# Altium PCB Boost.PcbDoc
Units mil, origin at the board's own origin, x right, y up, seen from the top; angles counter-clockwise.
Board outline 1968.5 x 1968.5 mil, 2 copper layers (Top Layer, Bottom Layer); 16 components, 10 nets, 36 pads, 0 vias.
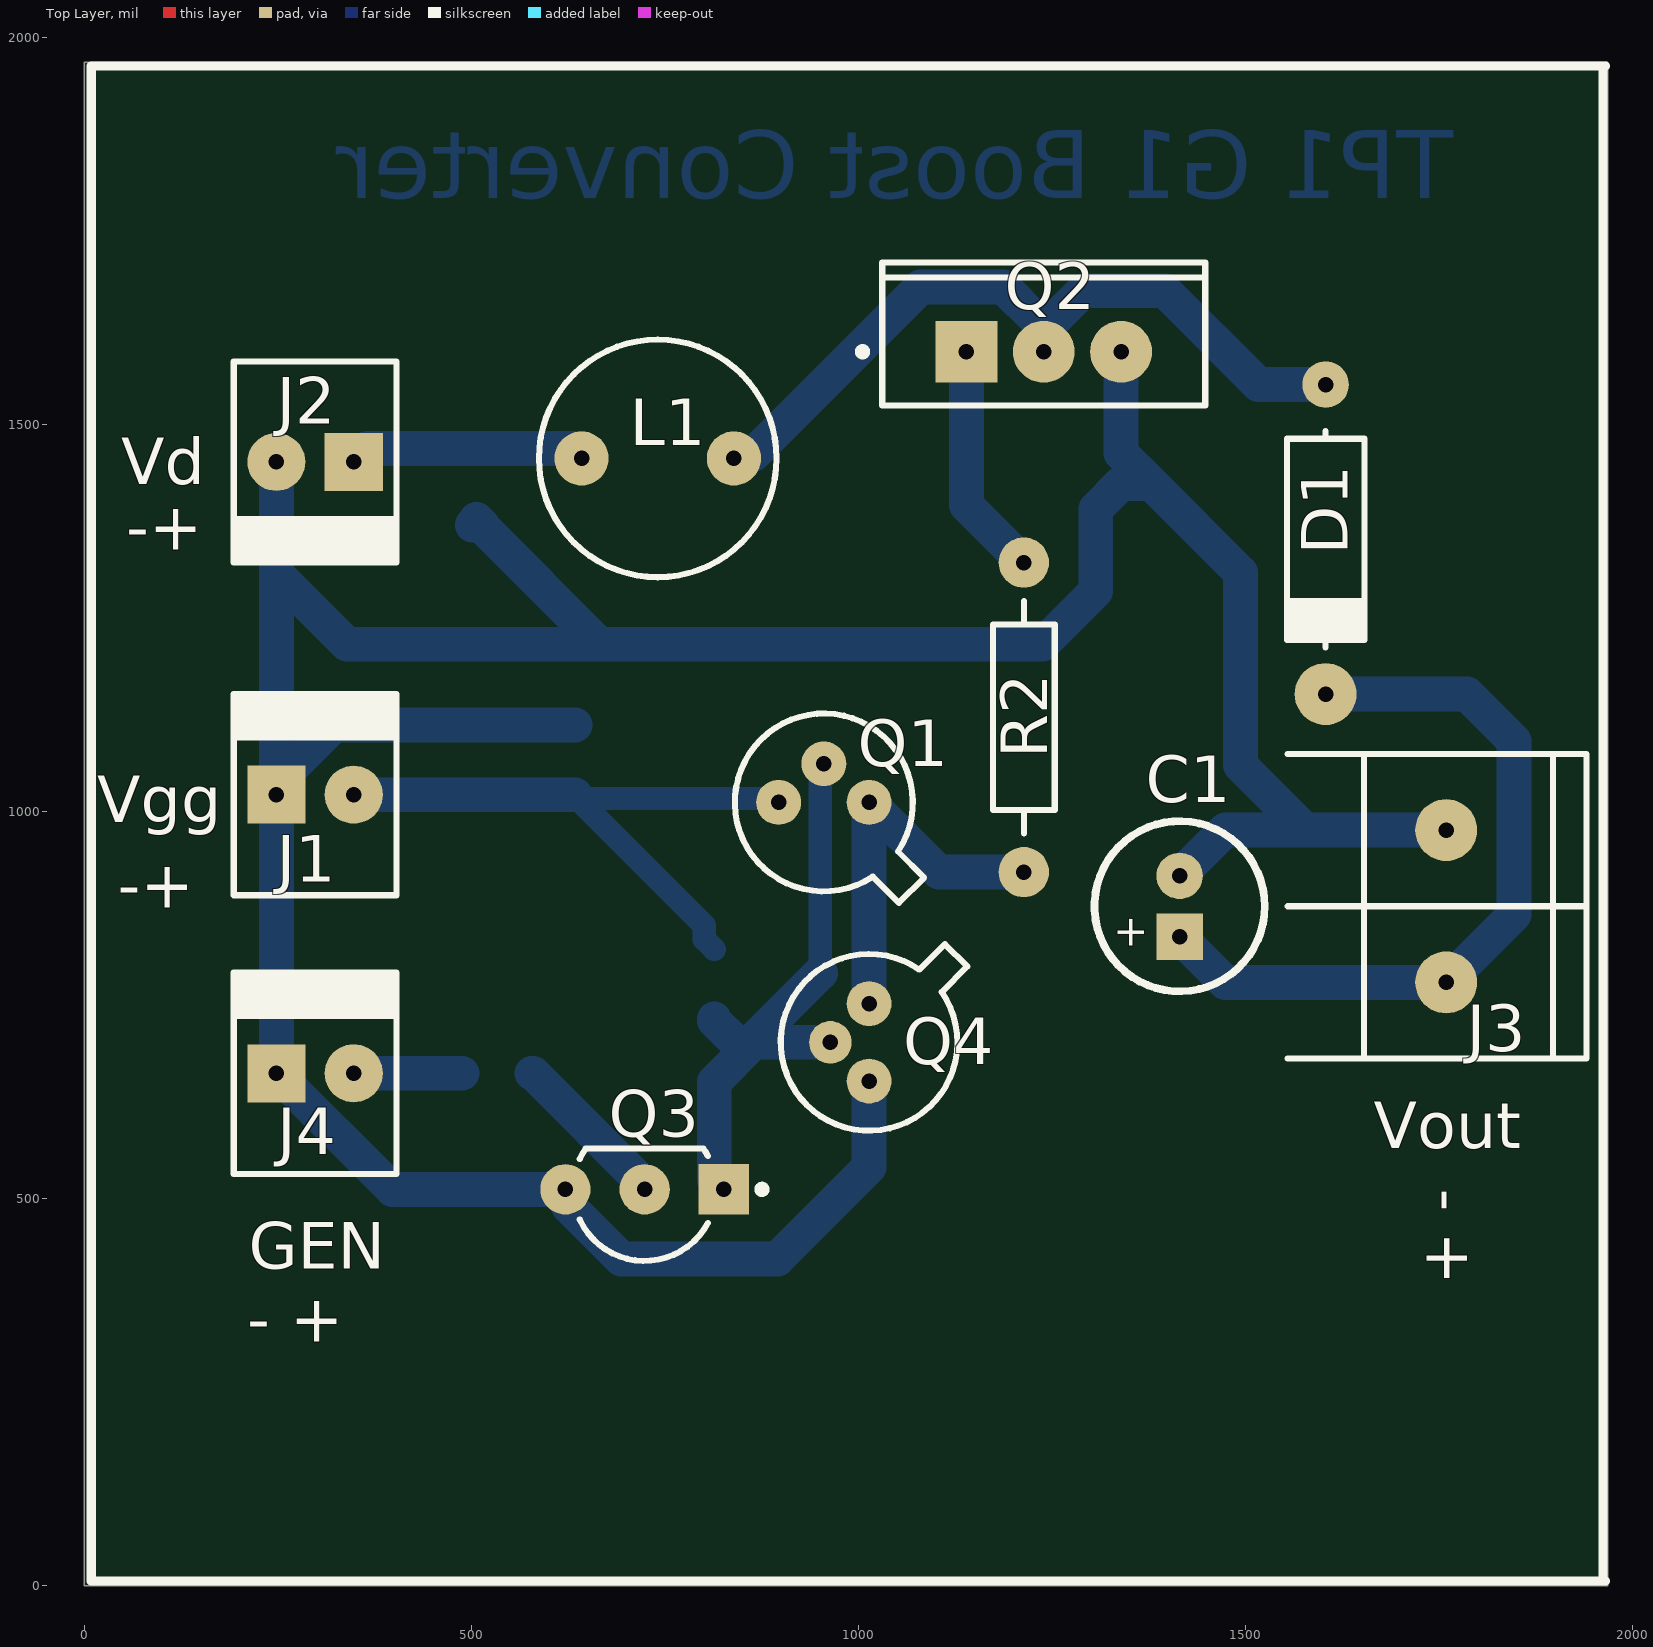
[diagram p0: Top Layer view]
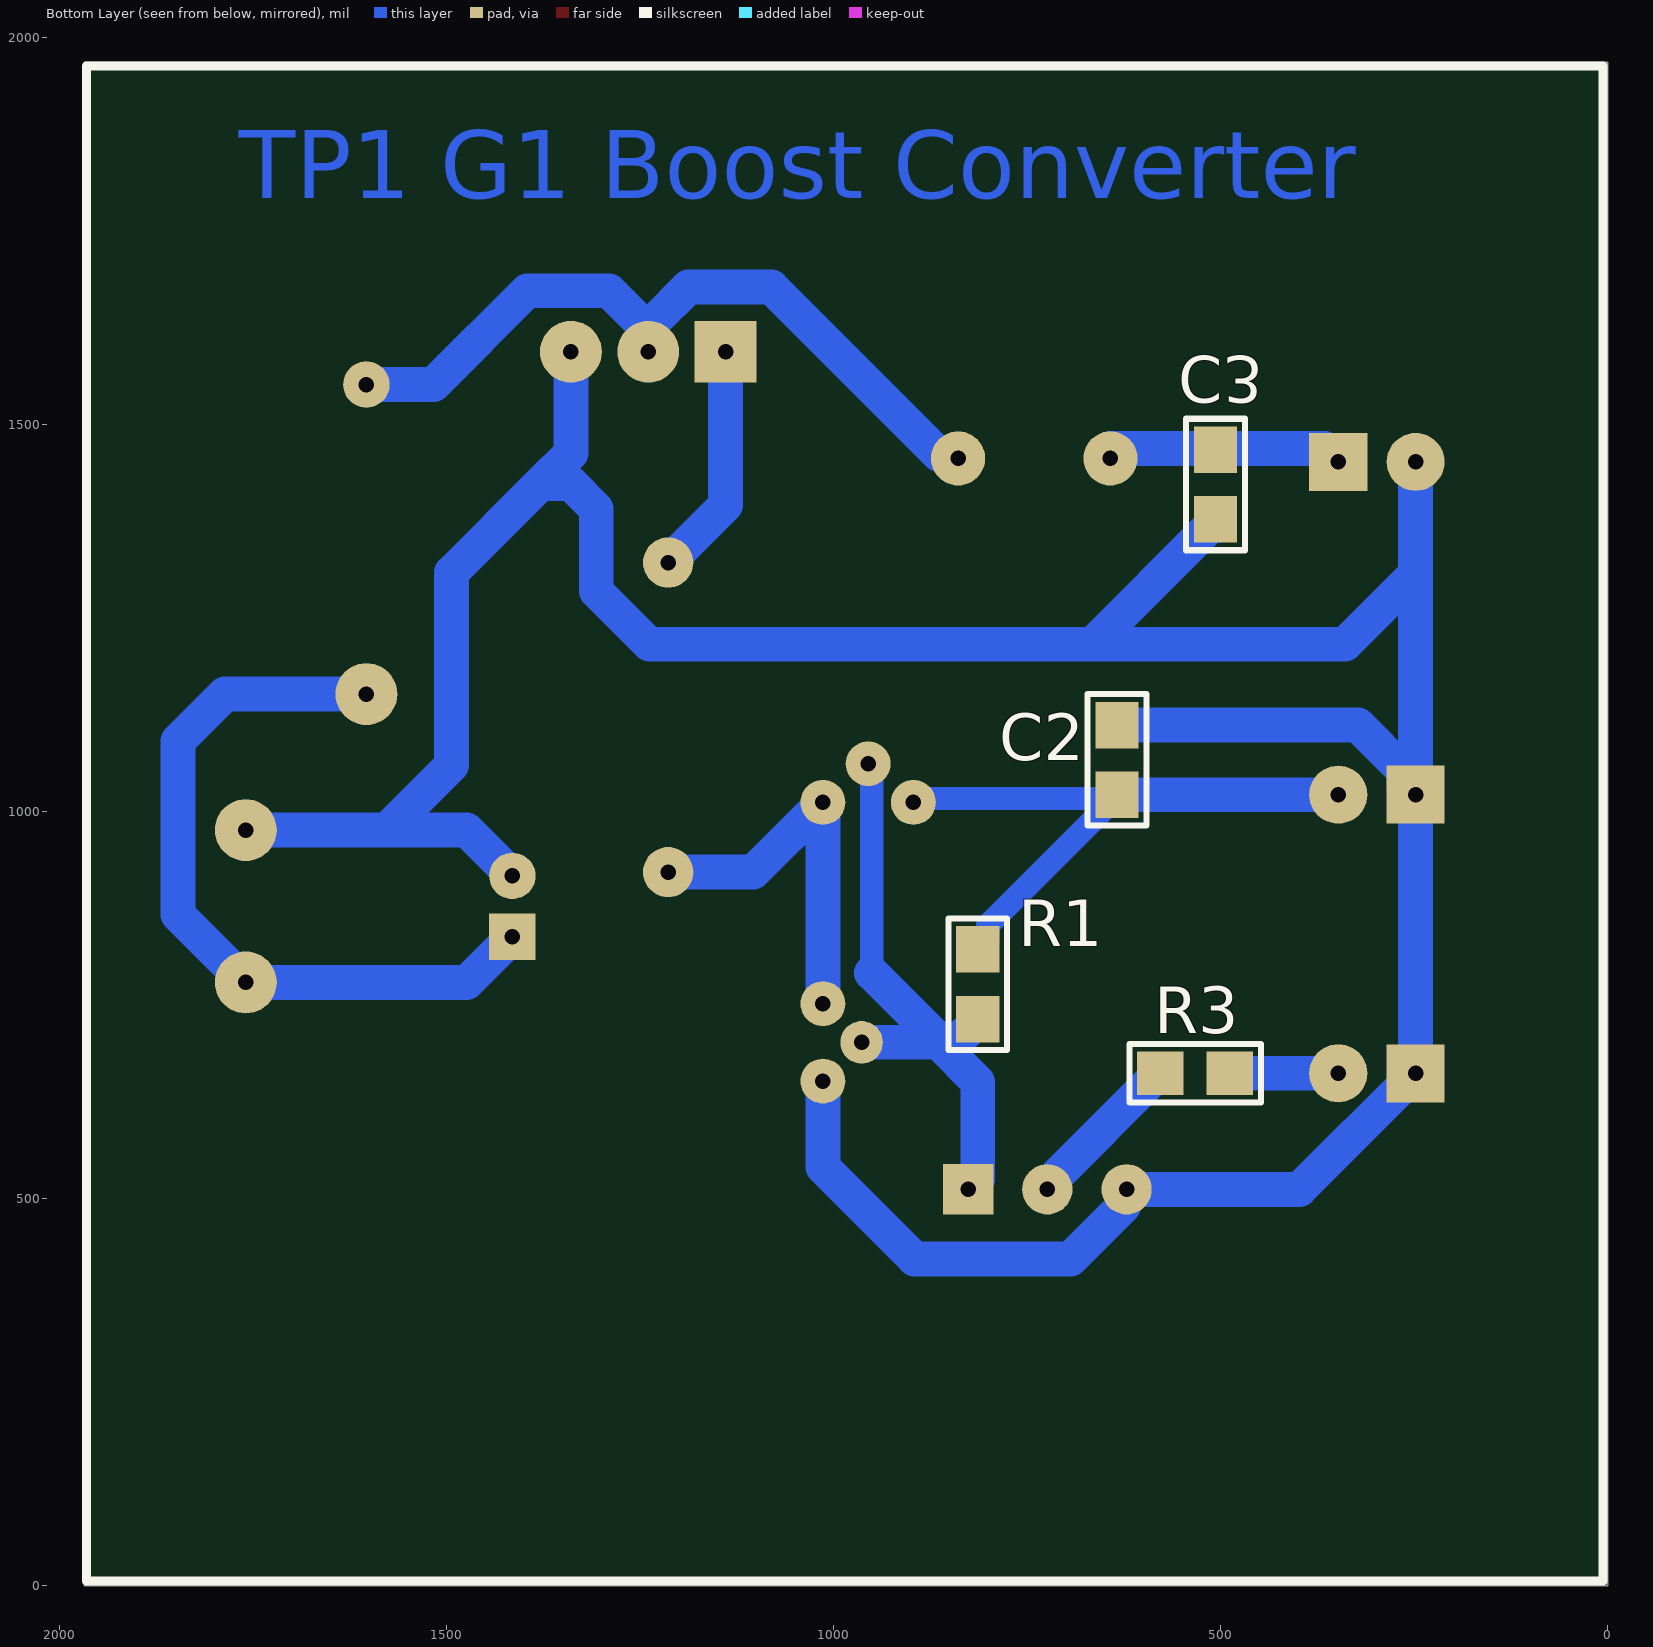
[diagram p1: Bottom Layer view, seen from below]
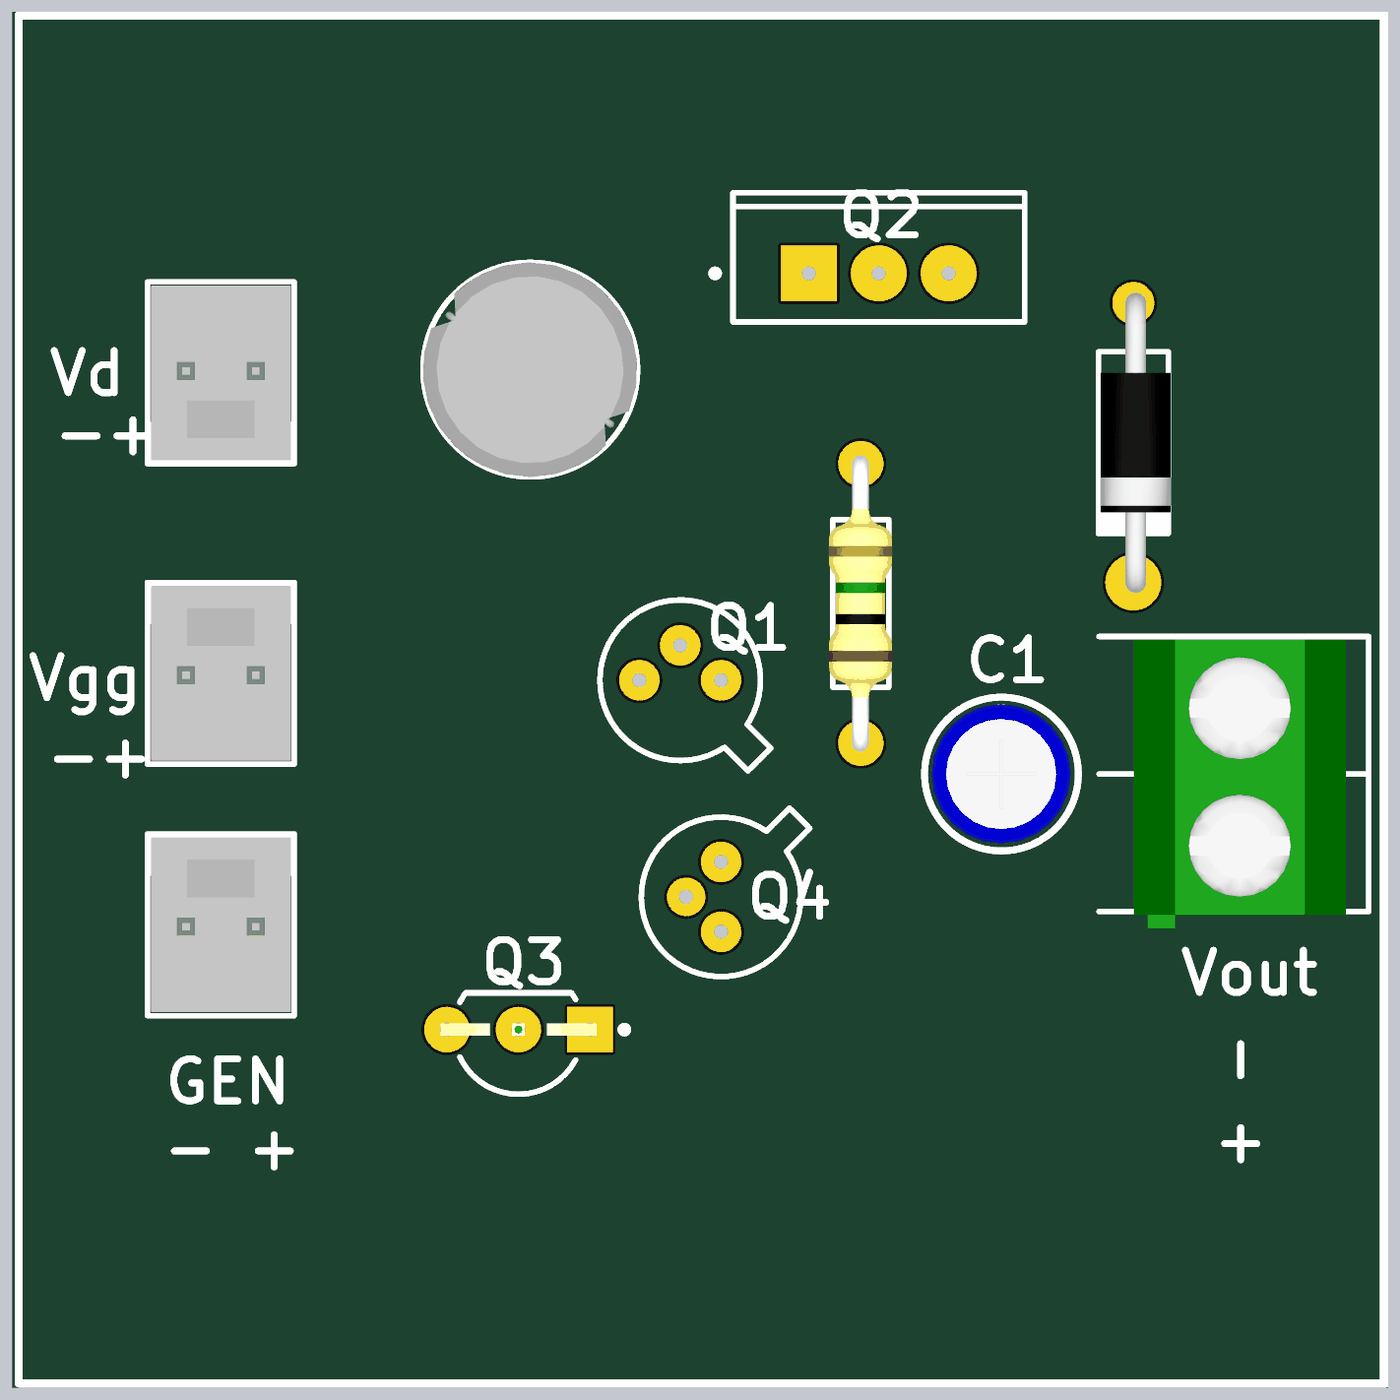
[diagram p2: 3D render of the assembled board from above, using the file's embedded part models]
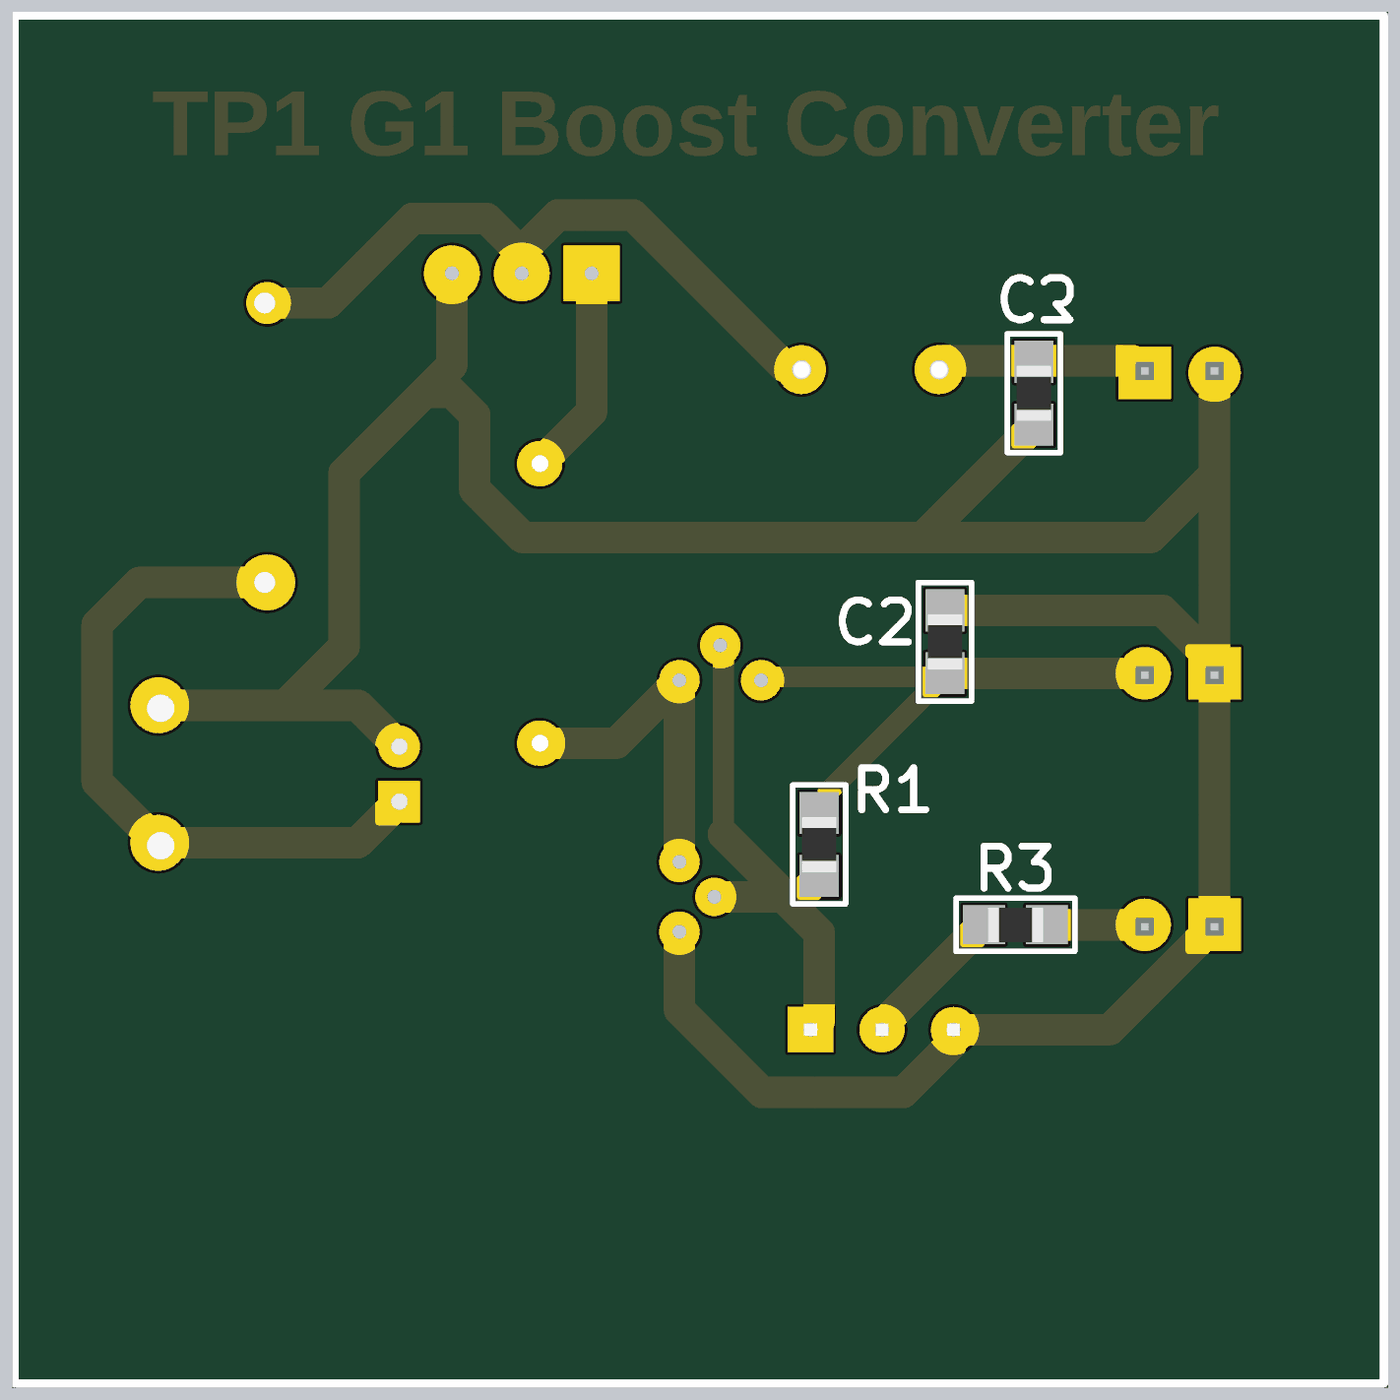
[diagram p3: 3D render of the assembled board from below, using the file's embedded part models]

## Layer stack, top to bottom
Top Solder: solder mask 0.4, Solder Resist, Dk 3.5
Top Layer: signal copper 1.4
Dielectric 1: dielectric 12.6, FR-4, Dk 4.8
Bottom Layer: signal copper 1.4
Bottom Solder: solder mask 0.4, Solder Resist, Dk 3.5

## Board outline
0,0 1968.5,0 1968.5,1968.5 0,1968.5

## Design rules (kind name [scope] priority, off if disabled: settings)
Clearance [All] p1: gap=10 ignorepadtopadclearanceinfootprint=FALSE except(0: Arc-Hole Track-Hole SMDPad-Hole THPad-Hole Via-Hole Fill-Hole Poly-Hole Region-Hole Text-Hole; 15: Arc-Fill Arc-Poly Arc-Region Track-Fill Track-Poly Track-Region SMDPad-Fill SMDPad-Poly SMDPad-Region THPad-Fill THPad-Poly THPad-Region Via-Fill Via-Poly Via-Region)
HoleToHoleClearance [All] p1: gap=5 allowstackedmicrovias=TRUE
MinimumSolderMaskSliver [All] p1: minsoldermaskwidth=5
PlaneClearance [All] p1: clearance=40
PolygonConnect [All] p1: connectstyle=Relief reliefconductorwidth=20 reliefentries=4 polygonreliefangle="90 Angle" airgapwidth=10
RoutingVias [All] p1: holewidth=28 width=50 viastyle="Through Hole" minholewidth=28 minwidth=50 maxholewidth=28 maxwidth=50
SilkToSilkClearance [All] p1: silktosilkclearance=0
SilkToSolderMaskClearance [IsPad] p1: minsilkscreentomaskgap=0 clearancetoexposedcopper=TRUE
SolderMaskExpansion [All] p1: expansion=4 istentingtop=FALSE
Width [All] p1: maxlimit=60 minlimit=10 preferedwidth=20
25 further rules are at their usual default settings.

## Components (designator, comment, footprint, x,y, rotation, side; value= is the part's Value field where it differs from the comment)
C1 "4.7u" CAP100RP 1415.35,877.95 r90 top
C2 "1u" 0805 634.04,1067.13 r270 bottom
C3 "1u" 0805 506.72,1422.95 r90 bottom
D1 "MUR160" DO41 1604.04,1352.13 r270 top
J1 "Vgg" MOLEX2 248.14,1022.13 r0 top
J2 "Vd" MOLEX2 348.14,1452.13 r180 top
J3 "LOAD" BORNERA2 1759.84,877.95 r180 top
J4 "Generador" MOLEX2 248.14,662.13 r0 top
L1 "221KL" WE-TI-L 740.97,1456.69 r0 top
Q1 "2N2222" MLTC-TO-18-3 955.58,1012.13 r180 top
Q2 "IRF540" VISH-TO-220AB-3_A 1239.76,1594.49 r90 top
Q3 "BC547BRL1G" ONSC-TO-92-3-29-11_AM_BL 724.04,512.13 r180 top
Q4 "2N2907A" STM-TO-18-3 1014.04,702.13 r270 top
R1 "1K" 0805 814.04,777.13 r90 bottom
R2 "22" RES400 1214.04,922.13 r90 top
R3 "330" 0805 533.14,662.13 r0 bottom

## Footprints (in the part's own frame and the unit in brackets; to place one, negate y for a bottom-side part, rotate by r counter-clockwise, add the part's x,y. Pads: shape width x height; smd on the part's side, far side on the other; paste and mask are expansions set on the pad)
0805 [mil] "Pasivo 0805"
  rect 60x56 smd: 1(-45,0) 2(45,0)
  silkscreen extent -85,-38 85,38, body extent -40,-25 39,25, height 15
BORNERA2 [mil] "Bornera con Tornillos 5mm separación"
  round 80 hole 20: 1(0,98.43) 2(0,-98.43)
  silkscreen extent -181,-197 205,197, body extent -148,-193 155,221, height 394
CAP100RP [mil] "Body diameter 5mm"
  rect 60x60 hole 20: 1(-39.37,0)
  round 60 hole 20: 2(39.37,0)
  silkscreen extent -110,-110 110,110, body extent -99,-99 99,100, height 454
DO41 [mil]
  round 60 hole 20: 1(-200,0)
  round 80 hole 20: 2(200,0)
  silkscreen extent -140,-50 140,50, body extent -215,-47 215,54, height 80
MLTC-TO-18-3 [mil] "TO-18, 3-Leads"
  round 58 hole 20: 1(-58.46,0) 2(0,-50) 3(58.46,0)
  silkscreen extent -130,-115 115,130, body extent -129,-115 115,130, height 210
MOLEX2 [mil]
  rect 75x75 hole 20: 1(0,0)
  round 75 hole 20: 2(100,0)
  silkscreen extent -55,-130 155,130, body extent -50,-125 150,125, height 423
ONSC-TO-92-3-29-11_AM_BL [mil] "TO, 3-Leads, Body Dia 4.7mm, Pitch 2.6mm"
  rect 65x65 hole 20: 1(-102.36,0)
  round 65 hole 20: 2(0,0) 3(102.36,0)
  silkscreen extent -156,-53 84,92, body extent -112,-53 112,93, height 210
RES400 [mil]
  round 65 hole 20: 1(0,0) 2(400,0)
  silkscreen extent 50,-40 350,40, body extent -12,-45 412,46, height 95
STM-TO-18-3 [mil] "TO, 3-Leads, Diameter 5.8mm"
  round 55 hole 20: 1(0,-50)
  round 58 hole 20: 2(50,0) 3(-50,0)
  silkscreen extent -127,-114 114,127, body extent -127,-114 114,127, height 209
VISH-TO-220AB-3_A [mil] "FM, 3-Leads, Body 10.55x4.65mm, Pitch 2.54mm"
  rect 80x80 hole 20: 1(0,100)
  round 80 hole 20: 2(0,0) 3(0,-100)
  silkscreen extent -69,-209 116,239, body extent -69,-208 115,208, height 760
WE-TI-L [mil] "THT Inductor, 2-Leads, Body 7.8 x 7.8 mm"
  round 70 hole 20: 1(-98.43,0) 2(98.43,0)
  silkscreen extent -154,-154 154,154, body extent -154,-154 153,153, height 374

## Part data
C1: library part CAPPOL
C2 C3: library part CAP
D1: library part DIODO
J1 J2 J4: library part MOLEX2
J3: library part "BORNERA 2"
L1: library part CMP-0225-00044-1, "Radial Leaded Wire Wound Inductor WE-TI, L = 22.0 µH", Inductance="22.0 ÂµH", ComponentLink1Description="Manufacturer Link", ComponentLink1URL=http://www.we-online.com, ComponentLink2Description=Datasheet, ComponentLink2URL=http://www.we-online.de/katalog/media/pdf/744772220.pdf, DatasheetVersion="ver 2, Dec-2004", PackageDescription="THT Inductor, 2-Leads, Body 7.8 x 7.8 mm", PackageReference=WE-TI-L, PackageVersion=2006
Q1: library part CMP-2000-05237-1, "Low Power Bipolar NPN Transistor, 30 V, -65 to 200 degC, 3-Pin TO-18, RoHS, Bulk", Collector Emitter Voltage V(br)ceo=30V, Collector Emitter Voltage Vces=400mV, Continuous Collector Current Ic Max=800mA, Current Ic @ Vce Sat=150mA, DC Current Gain hFE=100, Full Power Rating Temperature=25degC, Manufacturer=Multicomp, Package / Case=TO-18, Package Description="3-Pin Transistor Outline Package (TO-18), Dia 5.54 mm, Pitch Pitch 1.485mm", Package Reference=TO-18-3, Power Dissipation Pd=500mW, Voltage Vcbo=60V, Current Ic Continuous a Max=800mA, Current Ic hFE=150mA, Datasheet URL=http://www.farnell.com/datasheets/1662272.pdf, Datasheet Version="Rev. 1.1, 05/2012", DC Collector Current=800mA, Gain Bandwidth ft Min=250MHz, Gain Bandwidth ft Typ=250MHz, hFE Min=100, Manufacturer URL=http://uk.farnell.com/b/multicomp, No. of Pins=3, No. of Transistors=1, Pin Configuration=a, Power Dissipation Ptot Max=500mW, SVHC=NoSVHC(19-Dec-2012), Transistor Case Style=TO-18, Transistor Polarity=NPN
Q2: library part CMP-2000-06461-1, "Power MOSFET, 100 VDS, -55 to 175 degC, 3-Pin TO-220AB, RoHS, Tube", Id - Continuous Drain Current=28A, Manufacturer=Vishay, Maximum Operating Temperature=+175C, Minimum Operating Temperature=-55C, Package / Case=TO-220-3, Package Description="3-Pin Flange Mount, Body 10.275 x 4.45 mm, Pitch 2.54 mm", Package Reference=TO-220AB-3, Pd - Power Dissipation=150W, Rds On - Drain-Source Resistance=77mOhms, Vds - Drain-Source Breakdown Voltage=100V, Vgs - Gate-Source Voltage=20V, &lt;PCN&gt;=http://www.mouser.com/PCN/Vishay_SIL_0182015.pdf, Brand=VishaySemiconductors, Channel Mode=Enhancement, Configuration=Single, Datasheet URL=http://www.vishay.com/docs/91021/91021.pdf, Datasheet Version="Rev. B, 03/2011", Factory Pack Quantity=50, Fall Time=43ns, Height=9.01mm, Length=10.51mm, Manufacturer URL=http://www.vishay.com/, Mounting Style=ThroughHole, Mounting Technology=ThroughHole, Number of Channels=1Channel, Package URL=http://www.vishay.com/docs/71195/to220ab.pdf, Packaging=Tube, Product Category=MOSFET, Rise Time=44ns, RoHS=NoRoHSVersionAvailable, Technology=Si, Transistor Polarity=N-Channel, Transistor Type=1N-Channel, Typical Turn-Off Delay Time=53ns, Typical Turn-On Delay Time=11ns, Unit Weight=0.211644oz, Width=4.7mm
Q3: library part CMP-1048-01605-1, "Amplifier Transistor, NPN Silicon, 3-Pin TO-92, Pb-Free, Tape and Reel", Manufacturer="On Semiconductor", ComponentLink1Description="Manufacturer URL", ComponentLink1URL=http://www.onsemi.com/, ComponentLink2Description=Datasheet, ComponentLink2URL=http://www.onsemi.com/pub_link/Collateral/BC546-D.PDF, ComponentLink3Description="Package Specification", ComponentLink3URL=http://www.onsemi.com/pub_link/Collateral/MAC97-D.PDF, DatasheetVersion="Rev. 7", fT Min (MHz)=150, IC Continuous (A)=0.1, Mounting Technology="Through Hole", PackageDescription="3-Pin Transistor Outline, Body 4.825 x 3.685 mm, Pitch 1.27 mm", PackageReference=TO-92-3-29-11_AM_BL, PackageVersion="Rev. AM", Packing="Tape and Reel", PartNumber=BC547BRL1G, Polarity=NPN, RoHS=TRUE
Q4: library part CMP-2000-05561-1, "Small Signal PNP Transistor, 0.4 W, 60 V, 600 mA, 3-Pin TO-18, RoHS, Bulk", Collector Emitter Voltage V(br)ceo=-60V, DC Collector Current=-600mA, DC Current Gain hFE=300hFE, Manufacturer=STMicroelectronics, Operating Temperature Max=175°C, Package Description="3-Pin Through Hole Device, Dia 5.8 mm, Pitch 1.27 mm", Package Reference=TO-18-3, Power Dissipation Pd=400mW, Transistor Case Style=TO-18, Transition Frequency ft=200MHz, Automotive Qualification Standard=-, Datasheet URL=https://datasheet.ciiva.com/16614/cd00003088-16614659.pdf, Datasheet Version=02/2003, Manufacturer URL=http://www.st.com/, Mounting Technology=ThroughHole, MSL=-, No. of Pins=3Pins, Product Range=-, SVHC=NoSVHC(17-Dec-2015), Transistor Polarity=PNP
R1 R2 R3: library part RES

## Nets (pads, with @x,y where several pads share a name; then routed paths per layer and width w, separated by ;. In a path a pad name is that pad's centre, name@x,y a point inside that pad or via, vN(x,y) a via of type N, cw(c..) or ccw(c..) an arc to the next point about the centre after c; other vN are vias at no path point)
GND: C1.2 C2.1 C3.1 J1.1 J2.2 J3.2 J4.1 Q2.3 Q3.3 Q4.2 | length 4898.3
  Bottom Layer w45: J2.2 248.14,1307.96 ; C3.1@501.22,1370.45 506.72,1375.95 C3.1 514.72,1369.95 514.72,1367.95 666.14,1216.54 ; C2.1 322.76,1112.13 263.14,1052.51 263.14,1037.13 J1.1 ; Q4.2 1014.04,540.62 895.55,422.13 694.02,422.13 625.51,490.63 625.51,508.3 Q3.3 398.14,512.13 J4.1 J1.1 ; Q2.3 1339.76,1463.33 1378.89,1424.21 ; C1.2 1474.41,976.38 1577.76,976.38 ; J3.2 1577.76,976.38 ; J1.1 248.14,1307.96 ; 248.14,1307.96 339.57,1216.54 666.14,1216.54 ; 666.14,1216.54 1238.45,1216.54 1307,1285.08 1307,1391.43 1339.78,1424.21 1378.89,1424.21 ; 1378.89,1424.21 1494.04,1309.06 1494.04,1060.09 1577.76,976.38
NetC1_1: C1.1 D1.2 J3.1 | length 985.7
  Bottom Layer w45: C1.1 1474.41,779.53 J3.1 1847.44,867.13 1847.44,1091.54 1786.85,1152.13 D1.2
NetC2_2: C2.2 J1.2 Q1.3 R1.2 | length 820.6
  Bottom Layer w30: C2.2 634.04,1020.13 801.04,853.13 801.04,835.13 R1.2 ; C2.2@639.04,1017.13 892.11,1017.13 Q1.3
  Bottom Layer w45: J1.2 C2.2
NetC3_2: C3.2 J2.1 L1.1 | length 301.6
  Bottom Layer w45: J2.1 365.5,1469.49 505.74,1469.49 L1.1@642.55,1469.49
NetD1_1: D1.1 L1.2 Q2.2 | length 971.4
  Bottom Layer w45: L1.2 844.18,1461.48 864.04,1461.48 1080.71,1678.15 1187.78,1678.15 1232.11,1633.82 ; Q2.2 1239.76,1622.64 1290.35,1673.23 1396.12,1673.23 1517.22,1552.13 D1.1 D1.1@1600.44,1548.52
NetJ4_2: J4.2 R3.1 | length 147.1
  Bottom Layer w45: J4.2@353.14,667.13 J4.2 R3.1
NetQ1_1: Q1.1 Q4.3 R2.1 | length 497.3
  Bottom Layer w45: Q4.3 Q1.1 1104.04,922.13 R2.1
NetQ1_2: Q1.2 Q3.1 Q4.1 R1.1 | length 775.9
  Bottom Layer w30: 951.11,791.66 Q1.2@951.11,1057.66
  Bottom Layer w45: R1.1 814.04,730.13 842.04,702.13 865.16,702.13 ; Q3.1 814.04,524.49 814.04,651.01 865.16,702.13 ; 951.11,791.66 868.74,709.29 868.74,702.13 ; Q1.2@951.11,1057.66 Q1.2 ; Q4.1 868.74,702.13 ; 865.16,702.13 868.74,702.13
NetQ2_1: Q2.1 R2.2 | length 303.1
  Bottom Layer w45: Q2.1 1139.76,1396.4 R2.2
NetQ3_2: Q3.2 R3.2 | length 211.6
  Bottom Layer w45: R3.2 580.14,662.13 724.04,518.22 Q3.2

## Other copper
Bottom Layer:
  text "TP1 G1 Boost Converter" at 1768.7,1763.62 h150

## Silkscreen, mask and mechanical layers (free items; w line width, h text height)
Top Overlay:
  lines w11.81: 1962.6,5.91 1962.6,1963.58 ; 1965.55,5.91 8.86,5.91 8.86,1963.58 1965.55,1963.58
  text "Vd" at 47.4,1423.39 h60
  text "-+" at 54.29,1338.59 h60
  text "Vgg" at 16.89,986.69 h60
  text "-+" at 43.46,875.99 h60
  text "Vout" at 1666.5,565.12 h60
  text "- +" at 1734.41,512.64 h60 r270
  text "GEN" at 212.76,409.61 h60
  text "- +" at 210.79,315.12 h60
Bottom Overlay:
  lines w11.81: 1962.6,5.91 5.91,5.91 5.91,1963.58 1962.6,1963.58 ; 1965.55,5.91 1965.55,1963.58

## Dimensions
0,1968.5 to 1968.5,1968.5 on Top Component Center

## Text inside footprints (layer, text, board x,y; h text height)
C1: Top Overlay "+" at 1369.35,820.95 h40 r90